# EAGLE board LPC1114 -- Valdez Mutant v.03 (EAGLE 7.0.0)
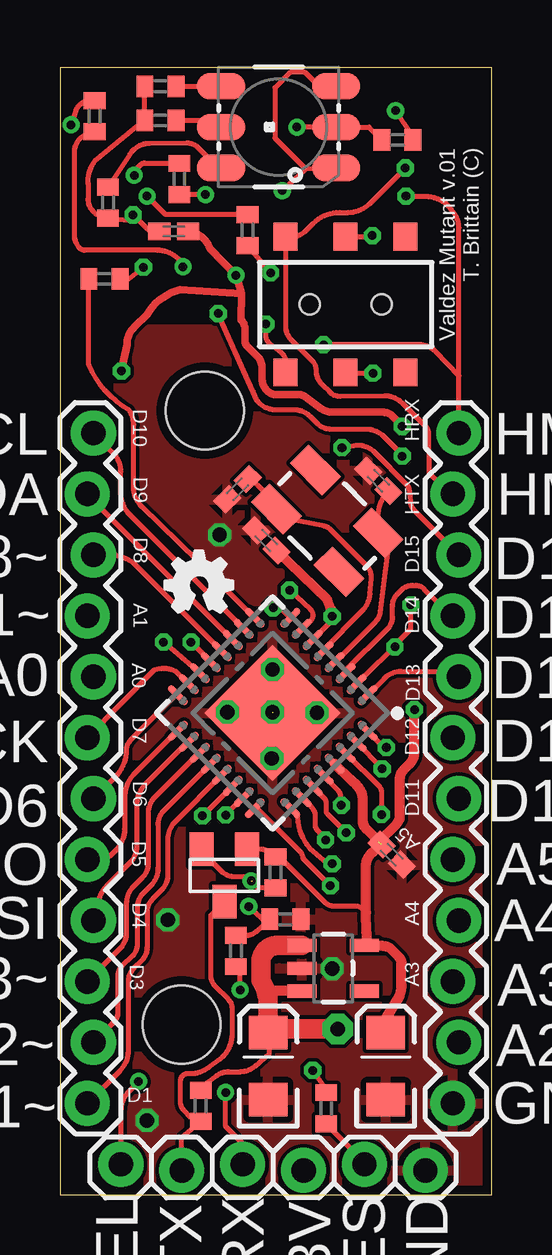
[diagram p0: board, top side]
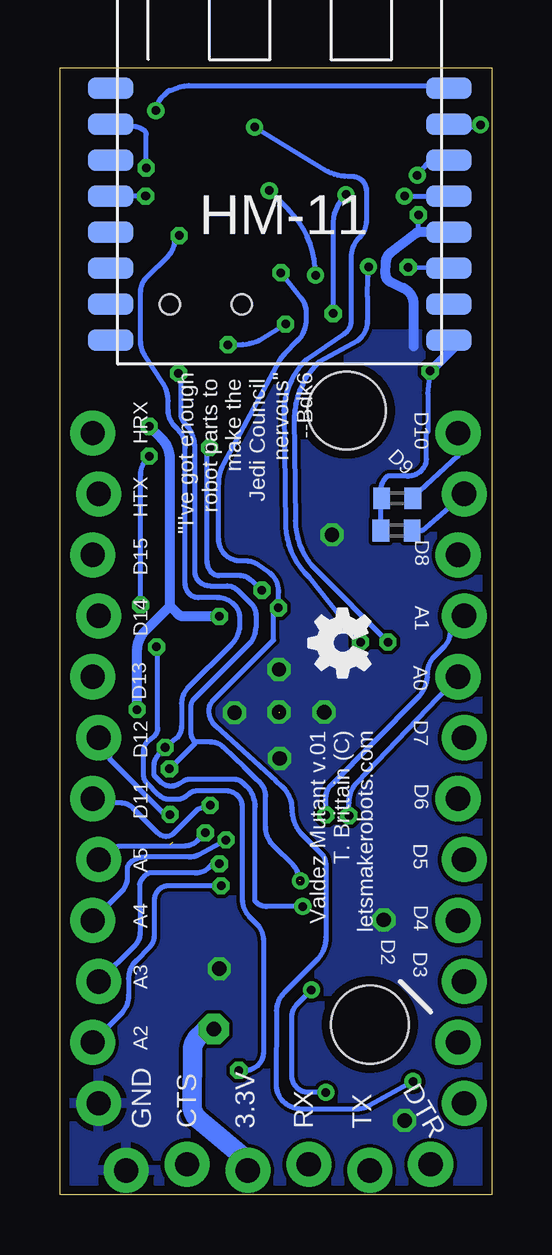
[diagram p1: board, bottom side, seen from below]

Size 18 x 46.97 mm. Coordinates in mm from the lower left corner, seen from the top.
Outline: 0,0 18,0 18,46.97 0,46.97 0,0
Copper layers (1*16): Top 0.0356mm / dielectric 1.5011mm / Bottom 0.0356mm
Design rules "LaenPCBOrder *": minimum track width 6mil, minimum drill 13mil, track to track 6mil, track to pad 6mil, pad to pad 6mil, via to via 6mil, smd to smd 6mil, copper to edge 15mil, drill to drill 6mil, minimum pad ring 7mil, minimum via ring 7mil, stop-mask expansion 3mil, vias tented up to drill 14mil, thermal gap 10mil
Holes 3.25 mm at 5.07,7.1 6.04,32.68

## Footprints (pad centres in the part's own frame; a part is rotated, then mirrored left to right if it is on the bottom)
CRYSTAL-SMD-5X3 = smd 1.9 x 1.1: 1 -1.85,-1.15; 2 1.85,-1.15; 3 1.85,1.15; 4 -1.85,1.15
SOT23-5 = smd 0.55 x 1.2: 1 -0.95,-1.3; 2 0,-1.3; 3 0.95,-1.3; 4 0.95,1.3; 5 -0.95,1.3
EIA3216 = smd 1.4 x 1.6: A 1.4,0; C -1.4,0
C0402K = smd 0.925 x 0.74: 1 -0.6,0; 2 0.6,0
1X12_LOCK = drill 1.016 pad 1.88: 1 0,0.127; 2 2.54,-0.127; 3 5.08,0.127; 4 7.62,-0.127; 5 10.16,0.127; 6 12.7,-0.127; 7 15.24,0.127; 8 17.78,-0.127; 9 20.32,0.127; 10 22.86,-0.127; 11 25.4,0.127; 12 27.94,-0.127
1X06_LOCK = drill 1.016 pad 1.88: 1 0,0; 2 2.54,-0.254; 3 5.08,0; 4 7.62,-0.254; 5 10.16,0; 6 12.7,-0.254
AYZ0202 = smd 1 x 1.15: 1 -2.5,2.825; 2 0,2.825; 3 2.5,2.825; 4 -2.5,-2.825; 5 0,-2.825; 6 2.5,-2.825 | hole 0.85: 1.5,0; -1.5,0
LED-TRICOLOR-5050 = smd 2 x 1.1: 1 -2.4,1.7; 2 -2.4,0; 3 -2.4,-1.7; 4 2.4,-1.7; 5 2.4,0; 6 2.4,1.7
SOT23 = smd 1 x 1.4: 1 -0.95,-1.1; 2 0.95,-1.1; 3 0,1.1
R0402 = smd 0.7 x 0.9: 1 -0.65,0; 2 0.65,0
HVQFN33-7X7 = smd 1.067 x 0.3: P$1 -3.327,2.275; P$2 -3.327,1.625; P$3 -3.327,0.975; P$4 -3.327,0.325; P$5 -3.327,-0.325; P$6 -3.327,-0.975; P$7 -3.327,-1.625; P$8 -3.327,-2.275; P$17 3.327,-2.275; P$18 3.327,-1.625; P$19 3.327,-0.975; P$20 3.327,-0.325; P$21 3.327,0.325; P$22 3.327,0.975; P$23 3.327,1.625; P$24 3.327,2.275 | smd 0.3 x 1.067: P$9 -2.275,-3.327; P$10 -1.625,-3.327; P$11 -0.975,-3.327; P$12 -0.325,-3.327; P$13 0.325,-3.327; P$14 0.975,-3.327; P$15 1.625,-3.327; P$16 2.275,-3.327; P$25 2.275,3.327; P$26 1.625,3.327; P$27 0.975,3.327; P$28 0.325,3.327; P$29 -0.325,3.327; P$30 -0.975,3.327; P$31 -1.625,3.327; P$32 -2.275,3.327 | smd 4 x 4: P$33 0,0
HM-11 = smd 1.9 x 0.9: 1 -0.3,11.5; 2 -0.3,10; 3 -0.3,8.5; 4 -0.3,7; 5 -0.3,5.5; 6 -0.3,4; 7 -0.3,2.5; 8 -0.3,1; 9 13.8,1; 10 13.8,2.5; 11 13.8,4; 12 13.8,5.5; 13 13.8,7; 14 13.8,8.5; 15 13.8,10; 16 13.8,11.5

## Placement (x,y rotation side)
7V-12.500MAAV-T  12.5mhz  [CRYSTAL-SMD-5X3]  11.15,28.09 315 top
AP2112K-3.3TRG1  V_REG_LDOSMD  [SOT23-5]  11.4,9.44 270 top
C1  10uF  [EIA3216]  8.69,5.36 90 top
C2  22pF  [C0402K]  7.4,29.41 45 top
C3  22pF  [C0402K]  13.28,29.75 315 top
C4  10uF  [EIA3216]  13.59,5.36 90 top
C5  1uF  [C0402K]  13.84,14.18 315 top
C6  1uF  [C0402K]  8.61,27.27 135 top
C7  1uF  [C0402K]  4.75,40.16 180 top
JP1  M12LOCK  [1X12_LOCK]  1.27,3.81 90 top
JP2  M12LOCK  [1X12_LOCK]  16.51,3.81 90 top
JP3  [1X06_LOCK]  2.54,1.27 0 top
JS202011SCQN  DPDT  [AYZ0202]  11.91,37.11 0 top
LED1  LED-TRICOLOR-5050NO_IC  [LED-TRICOLOR-5050]  9.12,44.5 180 top
Q2  BSS138  [SOT23]  6.86,13.31 180 top
R1  330  [R0402]  11.1,3.61 90 top
R2  1k  [R0402]  1.85,38.18 180 top
R3  10k  [R0402]  5.87,3.71 90 top
R4  10k  [R0402]  8.99,13.44 90 top
R5  20k  [R0402]  9.4,11.48 0 top
R6  10k  [R0402]  7.34,10.16 90 top
R7  470  [R0402]  4.19,44.78 0 top
R8  470  [R0402]  2.01,41.35 90 top
R9  470  [R0402]  4.19,46.2 0 top
R10  4.7K  [R0402]  3.94,29.03 0 bottom
R11  4.7K  [R0402]  3.96,27.69 0 bottom
R12  330  [R0402]  4.98,42.34 90 top
R13  330  [R0402]  7.82,40.21 90 top
R14  330  [R0402]  1.45,44.96 90 top
R15  330  [R0402]  14.07,43.97 0 top
U1  [HVQFN33-7X7]  8.87,20.08 225 top
U$1  HM-11  [HM-11]  15.59,34.62 0 bottom
U$2  [OSHW_FILLX100_NOTEXT]  4.38,24.28 0 top
U$3  [OSHW_FILLX100_NOTEXT]  5.08,21.59 90 bottom

## Library data of the parts
7V-12.500MAAV-T = SparkFun-FreqCtrl
AP2112K-3.3TRG1 = SparkFun-PowerIC
C1 C4 = SparkFun-Capacitors
C2 C3 C5-C7 R1-R15 = resistor
JP1-JP3 = SparkFun-Connectors
JS202011SCQN = SparkFun-Electromechanical; PROD_ID: SWCH-08179
LED1 = SparkFun-LED
Q2 = SparkFun-DiscreteSemi; PROD_ID: TRANS-00830
U1 = microbuilder; DIGIKEY#: 568-4948-ND; MANF: NXP; MANF#: LPC1114FHN33/301,5
U$1 = HM-11
U$2 U$3 = ohw-logo

## Nets
3.3V: AP2112K-3.3TRG1.5 C4.A C5.1 C6.1 C7.1 LED1.1 LED1.3 Q2.1 R4.2 R10.1 R11.1 U1.P$6 U1.P$29 U$1.9
5V: AP2112K-3.3TRG1.1 AP2112K-3.3TRG1.3 C1.A JP3.4 R3.2
CONN: R15.2 U$1.16
GND: AP2112K-3.3TRG1.2 C1.C C2.1 C3.1 C4.C C5.2 C6.2 C7.2 JP2.1 JP3.6 R5.2 R7.1 R8.1 R9.1 U1.P$33 U$1.12
HM-RX: JP2.12 JS202011SCQN.4 U$1.4
HM-TX: JP2.11 JS202011SCQN.1 U$1.2
HM_CONN: LED1.2 R15.1 U1.P$13
HM_KEY: R14.1 U1.P$14
IO20: JP2.8 U1.P$1
IO_00_RES: R1.2 R12.1 U1.P$2
IO_01: JP2.9 U1.P$3
IO_02_SEL: JP3.1 R13.1 U1.P$8
IO_03: R2.2 U1.P$9
IO_05-SDA: JP1.11 R11.2 U1.P$11
IO_06: JP1.7 U1.P$15
IO_07: JP1.6 U1.P$16
IO_08: JP1.5 U1.P$17
IO_08-SCL: JP1.12 R10.2 U1.P$10
IO_09: JP1.4 U1.P$18
IO_10: JP1.8 U1.P$22
IO_010: JP1.3 U1.P$19
IO_11: JP1.9 U1.P$23
IO_011: JP1.1 U1.P$21
IO_12: JP2.2 U1.P$24
IO_13: JP2.3 U1.P$25
IO_14: JP2.4 U1.P$26
IO_15: JP2.7 U1.P$30
IO_18: JP2.10 U1.P$7
IO_19: JP1.10 U1.P$12
IO_32: JP2.6 U1.P$28
IO_110: JP1.2 U1.P$20
IO_111: JP2.5 U1.P$27
KEY: R14.2 U$1.15
LPC_RES: R12.2 U$1.14
LPC_SEL_BOOT: R13.2 U$1.13
N$2: LED1.4 R9.2
N$3: LED1.6 R8.2
N$4: LED1.5 R7.2
N$9: R2.1 U$1.11
N$31: 7V-12.500MAAV-T.3 C3.2 U1.P$4
N$32: 7V-12.500MAAV-T.1 C2.2 U1.P$5
RESET: JP3.5 R1.1
RX: JS202011SCQN.2 R5.1 R6.2 U1.P$32
RX-5V: JP3.3 R6.1
TX: JS202011SCQN.5 Q2.2 R4.1 U1.P$31
TX-5V: JP3.2 Q2.3 R3.1

## Tracks (layer width: path | path; a pad name or v marks a point on that pad's centre or on a via)
3.3V  (via drill 0.36, 0.36 pad 0.25)  (1 unrouted)
  Top 0.203: AP2112K-3.3TRG1.5 | 11.35,23.94 U1.P$6 | Q2.1 8.33,14.41 arc-45 8.91,14.17 R4.2 9.15,14.09 11.08,12.16 arc45 11.37,12.04 12.3,12.04 arc-45 12.62,11.9 12.77,11.76 | 12.21,42.72 12.08,42.7 LED1.1 10.26,42.75 | 10.26,42.75 v9.27,41.86 | v7.34,38.33 7.34,38.32 7.36,38.3 | LED1.3 10.8,46.2 10.21,46.79 9.6,46.79 8.97,46.15 8.97,44.05 10.26,42.75
  Top 0.305: v14.28,32.03 13.86,32.46 arc46 13.5,32.61 11.37,32.61 arc-37 10.88,32.78 10.21,33.27 arc37 9.98,33.35 9,33.35 arc-45 8.68,33.48 8.64,33.52 arc-45 8.43,34.02 8.43,34.44 arc45 8.22,34.96 7.81,35.37 arc-45 7.72,35.58 7.72,36.06 arc45 7.55,36.46 7.57,37.57 | v2.56,34.34 2.79,35.42 arc-45 3.1,36.18 3.62,36.7 arc-45 5.02,37.72 7.57,37.57 | 7.57,37.57 7.36,38.3 6.27,39.43 arc64 C7.1
  Top 0.406: U1.P$29 12.14,17.3 12.38,17.05 arc-45 12.62,16.48 12.62,15.6 arc45 12.77,15.24 C5.1 13.01,14.25 12.98,14.22 arc45 12.75,13.68 12.77,11.76 12.78,10.95 12.78,10.47 AP2112K-3.3TRG1.5 12.73,10.36 13.48,10.36 arc-45 13.84,10.22 14.11,9.95 arc-45 14.25,9.61 14.25,8.75 arc-31 14.07,8.12 13.61,7.37 C4.A | v14.78,20.22 14.78,18.45 arc-45 14.58,17.95 14.34,17.72 arc45 14.17,17.31 14.17,15.78 arc-45 14.04,15.47 13.28,14.71 | 11.35,23.94 v11.35,24.11 11.3,24.4 11.15,24.81 C6.1
  Bottom 0.203: R10.1 4.61,29.01 R11.1 4.61,29.4 arc45 4.42,29.87 4.32,29.97 3.59,29.97 arc-45 3,30.12 2.89,30.23 arc-45 2.72,30.65 2.72,31.75 2.66,31.81 2.66,33.38 v2.56,34.34 | v7.34,38.33 7.34,38.36 arc-45 8.45,41.04 v9.27,41.86
  Bottom 0.406: v14.78,20.22 14.78,22.67 arc45 14.43,23.52 13.41,24.54 | 13.41,24.54 13.41,30.67 arc-45 13.76,31.52 v14.28,32.03 | v2.56,34.34 1.52,35.36 U$1.9 | 11.23,23.98 v11.35,24.11 12.81,24.11 arc45 13.1,24.23 13.41,24.54
5V  (via drill 0.6 pad 1.27)
  Top 0.203: AP2112K-3.3TRG1.3 | 8.84,6.91 C1.A 8.74,6.71 8.74,5.89 8.13,5.36 arc-41 7.53,5.13 7.05,5.13 arc37 6.53,4.96 5.93,4.51 R3.2
  Top 0.406: 8.59,8.51 9.68,8.51 AP2112K-3.3TRG1.3
  Top 0.813: 8.77,6.68 C1.A 8.69,8.1 arc17 8.66,8.25 8.59,8.51 8.38,8.94 8.38,9.68 arc-45 8.6,10.2 arc-45 9.06,10.39 AP2112K-3.3TRG1.1 | v11.58,6.91 8.84,6.91
  Bottom 0.813: JP3.4 10.16,1.42 12.18,3.09 arc51 12.49,3.76 12.47,5.97 arc45 12.2,6.62 11.91,6.91 v11.58,6.91
CONN  (via drill 0.36)
  Top 0.203: R15.2 14.72,44.13 v14,45.19
  Bottom 0.203: v14,45.19 13.98,45.22 arc45 13.65,45.84 13.46,46.02 13.44,46.02 13.07,46.15 arc19 12.62,46.23 2.23,46.23 U$1.16
GND  (via drill 0.36, 0.6 pad 0.81)  (1 unrouted)
  Top 0.203: 4.15,40.11 C7.2 3.94,40.16 arc-45 3.58,40.31 v3.05,40.84 2.83,40.63 R8.1 1.94,40.77 1.91,40.77 arc-90 1.17,41.51 1.17,42.13 arc-45 1.45,43.09 3.2,44.53 3.54,44.53 R7.1 R9.1
  Bottom 0.203: 3.06,40.12 3.06,40.42 v3.05,40.84
  Bottom 0.406: 3.25,35.36 3.25,37.13 arc-64 3.67,37.79 4.23,38.06 arc64 4.42,38.36 4.41,38.88 arc51 4.21,39.26 3.17,40.07 arc25 3.06,40.12 U$1.12
  other vias: 8.86,20.12 8.86,21.89 10.72,20.09 8.84,18.19 6.99,20.12 3.63,3.1 11.35,9.42 4.5,11.46 6.65,27.51
  pour Bottom: 0,35.86 0,0 17.78,0 17.78,35.86
  pour Top: 0.2,36.07 0,0 17.78,0 17.98,36.07
HM-RX  (via drill 0.36, 0.36 pad 0.25)
  Top 0.203: JS202011SCQN.4 9.41,34.72 arc52 9.22,35.11 8.72,35.51 arc-18 8.66,35.57 8.66,35.57 arc-34 8.59,35.82 v8.59,36.3 | JP2.12 16.64,34.14 | 16.64,34.14 16.64,40.3 arc38 16.41,40.95 16.3,41.09 arc52 15.25,41.6 14.45,41.6 v14.43,41.63 | 16.64,34.14 15.68,35.14 arc46 14.98,35.43 v11,35.43
  Bottom 0.203: v14.43,41.63 15.88,41.63 U$1.4 | v11,35.43 10.5,35.43 arc-25 9.7,35.61 v8.59,36.3
HM-TX  (via drill 0.36 pad 0.25)
  Top 0.203: v14.4,42.8 12.92,41.32 arc-45 12.02,40.95 11.66,40.95 arc45 10.57,40.49 10.27,40.19 arc-45 9.65,39.93 JS202011SCQN.1 9.42,39.92 9.42,36.17 arc45 9.64,35.65 10.52,34.77 arc-45 10.69,34.35 arc45 10.93,33.77 11.25,33.45 arc46 11.68,33.28 13.54,33.3 arc-45 14.28,33 15.25,32.05 arc-45 15.37,31.76 15.39,30.07 JP2.11
  Bottom 0.203: v14.4,42.8 14.4,44.2 arc-45 14.45,44.32 arc-45 14.94,44.53 15.79,44.53 U$1.2
HM_CONN  (via drill 0.36, 0.36 pad 0.25)
  Top 0.203: U1.P$13 6.22,22.2 6.22,22.28 v5.46,23.04 | 11.51,44.45 11.47,44.49 | 11.47,44.49 v9.88,44.5 | 11.47,44.49 11.48,44.5 LED1.2 12.89,44.5 R15.1
  Bottom 0.203: v5.46,23.04 7.61,25.75 arc45 8.59,27.85 8.66,32.71 arc45 7.72,34.8 6.13,35.89 arc-56 5.85,36.42 5.85,39.06 arc45 5.5,39.92 arc-45 5.21,40.62 5.21,41.83 arc-90 5.82,42.44 5.98,42.44 arc31 6.95,42.72 v9.88,44.5
HM_KEY  (via drill 0.36, 0.36 pad 0.25)
  Top 0.203: U1.P$14 5.83,21.76 v4.32,23.04 | v5.13,38.68 5.13,38.81 4.93,39.01 arc45 4.06,39.37 1.03,39.37 arc-45 0.83,39.45 arc-45 0.61,39.99 0.61,43.47 arc-90 1.39,44.25 R14.1
  Bottom 0.203: v4.32,23.04 7.33,26.05 arc45 8.18,28.1 8.23,32.42 arc45 7.18,34.73 5.58,35.59 5.49,35.69 arc-45 5.18,36.43 5.18,37.45 5.16,38.28 v5.13,38.68
IO20
  Top 0.203: U1.P$1 13.53,21.53 arc-45 14.23,21.82 16.41,21.82 JP2.8
IO_00_RES  (via drill 0.36, 0.36 pad 0.25)
  Top 0.203: v14.63,24.59 14.63,23.62 arc-45 14.59,23.53 13.97,22.91 v13.97,22.84 13.11,22.02 U1.P$2 | v14.28,30.79 14.22,30.89 13.5,31.61 arc45 12.79,31.9 11.33,31.9 arc-45 10.72,32.16 10.45,32.43 arc45 9.76,32.72 8.95,32.72 arc-48 8.22,33.1 8.05,33.49 7.84,33.94 v6.6,36.73 | v10.54,5.18 11.1,4.42 R1.2 | v6.07,41.69 R12.1
  Bottom 0.203: v13.97,22.84 13.92,22.78 13.92,19.44 arc52 14.09,19.09 14.33,18.91 arc-52 14.5,18.55 14.5,17.43 arc-45 14.41,17.2 13.86,16.65 arc-45 13.46,16.48 13.09,16.48 arc-41 12.72,16.62 12.64,16.69 arc41 12.25,16.84 11.09,16.84 arc49 10.56,16.6 arc41 10.39,16.15 10.39,12.32 arc-45 10.08,11.58 9.8,11.3 arc45 9.5,10.58 9.5,5.94 arc54 9.81,5.34 arc36 10.31,5.18 v10.54,5.18 | v14.63,24.59 14.63,30.01 arc49 v14.28,30.79 | v6.6,36.73 6.6,40.41 arc45 v6.07,41.69
IO_01
  Top 0.203: U1.P$3 11.91,21.84 13.68,23.61 arc45 13.87,24.07 13.87,24.52 arc-45 14.1,25.07 14.23,25.21 arc-45 14.7,25.4 14.83,25.4 arc-45 15.19,25.25 15.65,24.79 16.26,24.21 JP2.9
IO_02_SEL  (via drill 0.36, 0.36 pad 0.25)
  Top 0.203: v8.89,24.46 9.3,24.36 U1.P$8 | v3.28,4.72 3.28,4.7 2.87,4.29 arc45 2.54,3.5 JP3.1 | v8.79,38.43 7.92,39.46 R13.1
  Bottom 0.203: v3.28,4.72 5.08,3.72 arc29 5.62,3.58 7.94,3.58 arc45 8.69,3.89 arc45 8.99,4.61 8.97,7.67 arc45 8.66,8.4 7.32,9.75 arc-45 6.91,10.74 6.91,13.78 arc-45 7.08,14.19 7.87,14.98 arc45 8.33,16.09 arc-49 8.76,17.04 8.99,17.25 11.5,19.52 arc48 11.79,20.18 arc45 11.61,20.59 9.09,23.11 9.09,24.28 v8.89,24.46 8.88,25.12 arc-56 9.31,25.96 9.72,26.25 arc-35 10.24,26.42 10.47,26.42 arc90 11.38,27.33 11.38,29.63 arc28 11.17,30.46 8.81,34.81 arc17 8.62,35.06 8.09,35.6 arc-45 7.72,36.48 7.72,36.79 arc-39 7.92,37.36 v8.79,38.43
IO_03
  Top 0.203: U1.P$9 8.11,24.04 5.71,26.44 3.42,28.67 arc-46 3.07,29.49 3.07,32.1 arc36 2.88,32.71 arc-36 1.2,34.59 R2.2
IO_05-SDA
  Top 0.203: JP1.11 1.14,29.19 U1.P$11
  Bottom 0.203: R11.2 2.9,27.69 JP1.11
IO_06
  Top 0.203: U1.P$15 5.31,21.36 4.83,21.81 arc45 3.94,21.87 JP1.7
IO_07
  Top 0.203: U1.P$16 4.82,20.82 2.94,18.94 arc45 2.77,18.53 arc-45 2.31,17.42 JP1.6
IO_08
  Top 0.203: U1.P$17 4.88,19.34 3.13,17.58 arc45 2.69,16.52 2.69,15.23 arc-45 2.34,14.38 2.13,14.17 arc-45 1.47,13.89 1.22,13.89 JP1.5
IO_08-SCL
  Top 0.203: U1.P$10 7.67,23.6 2.91,28.36 arc-45 2.54,29.25 2.54,30.13 arc45 2.2,30.94 JP1.12
  Bottom 0.203: JP1.12 1.4,30.79 3.25,29.08 arc45 3.24,29.08 R10.2
IO_09
  Top 0.203: U1.P$18 5.31,18.88 3.59,17.15 arc45 3.2,16.22 3.2,14.5 arc-45 2.93,13.85 1.93,12.85 arc45 1.57,12 1.57,11.61 JP1.4
IO_10  (via drill 0.36 pad 0.25)
  Top 0.203: U1.P$22 v5.94,15.8
  Bottom 0.203: v5.94,15.8 5.94,16.35 arc44 5.6,17.2 JP1.8
IO_010
  Top 0.203: U1.P$19 5.79,18.42 3.96,16.59 arc45 3.68,15.91 3.68,13.83 arc-45 3.42,13.2 3.06,12.84 arc45 2.77,12.14 2.77,10.93 arc-45 2.48,10.22 JP1.3
IO_11  (via drill 0.36 pad 0.25)
  Top 0.203: U1.P$23 7.61,16.58 v6.91,15.82
  Bottom 0.203: v6.91,15.82 6.91,16.55 arc45 6.69,17.09 3.06,20.73 arc-45 2.67,21.7 2.67,21.75 arc45 2.39,22.43 2.01,22.81 arc-45 1.7,23.55 1.7,23.57 JP1.9
IO_011
  Top 0.203: U1.P$21 4.8,15.55 arc45 4.5,14.81 4.5,13.34 arc-45 4.22,12.68 3.87,12.32 arc45 3.63,11.76 3.63,10.3 arc-45 3.4,9.76 3.08,9.43 arc45 2.85,8.87 2.85,6.02 arc-45 2.49,5.15 JP1.1
IO_12  (via drill 0.36 pad 0.25)
  Top 0.203: U1.P$24 8.19,16.12 10.03,14.28 arc-45 10.13,14.02 v11.28,12.88
  Bottom 0.203: v11.28,12.88 13.49,12.88 arc-45 13.88,12.72 arc-45 14.07,12.25 14.07,10.78 arc45 14.26,10.33 14.83,9.75 arc-45 15.14,9.02 15.14,8.32 arc45 15.47,7.51 JP2.2
IO_13  (via drill 0.36 pad 0.25)
  Top 0.203: U1.P$25 9.87,15.81 9.91,15.71 arc40 10.4,14.46 11.15,13.82 v11.35,13.79
  Bottom 0.203: v11.35,13.79 11.43,13.99 11.78,13.64 arc45 12.35,13.41 14.3,13.41 arc-45 14.68,12.95 14.66,10.92 arc46 14.87,10.4 JP2.3
IO_14  (via drill 0.36 pad 0.25)
  Top 0.203: U1.P$26 10.12,16.58 10.54,16.09 arc-41 10.64,15.82 10.64,15.43 arc40 10.73,15.18 v11.07,14.78
  Bottom 0.203: v11.07,14.78 12.22,14.17 arc28 12.6,14.07 14.46,14.07 arc-45 15.1,13.8 arc-45 15.19,13.59 15.19,13.24 arc45 15.45,12.62 JP2.4
IO_15  (via drill 0.36 pad 0.25)
  Top 0.203: U1.P$30 13.31,17.01 arc-45 13.41,16.78 v13.41,15.85
  Bottom 0.203: v13.41,15.85 13.56,15.8 15.92,18.16 arc57 15.93,18.16 arc-57 16.1,18.77 JP2.7
IO_18  (via drill 0.36 pad 0.25)
  Top 0.203: U1.P$7 10.05,23.54 10.45,23.92 arc94 10.45,24.4 v9.58,25.2 | v11.76,31.14 12.24,31.23 arc-55 13.12,30.95 14.46,29.61 arc-40 14.57,29.38 14.61,28.87 arc40 14.77,28.54 JP2.10
  Bottom 0.203: v9.58,25.2 10.1,25.66 arc-42 10.48,25.81 11.38,25.81 arc47 11.68,25.94 arc43 11.86,26.41 11.86,31.04 v11.76,31.14
IO_19
  Top 0.203: JP1.10 2.07,26.67 arc-45 3.22,26.19 U1.P$12
IO_32  (via drill 0.36 pad 0.25)
  Top 0.203: U1.P$28 10.99,17.48 11.6,16.85 arc-44 11.71,16.58 11.71,16.36 v11.73,16.23
  Bottom 0.203: v11.73,16.23 12.27,16.05 13.25,15.07 arc45 13.58,14.94 arc45 13.9,15.07 14.94,16.11 arc-45 15.48,16.33 16.46,16.33 JP2.6
IO_110
  Top 0.203: U1.P$20 6.28,17.96 4.34,16.03 arc45 4.09,15.41 4.09,13.62 arc-45 3.78,12.88 3.46,12.56 arc45 3.23,11.98 3.23,10.44 arc-45 3.03,9.96 2.58,9.51 arc45 2.41,9.12 2.41,7.56 arc-45 2.27,7.23 JP1.2
IO_111  (via drill 0.36 pad 0.25)
  Top 0.203: U1.P$27 10.53,17.03 11.02,16.54 arc-45 11.1,16.34 11.1,16.01 arc45 11.16,15.87 v11.94,15.09
  Bottom 0.203: v11.94,15.09 12.25,14.78 arc45 12.85,14.53 15.39,14.53 arc-45 16.13,14.22 JP2.5
KEY  (via drill 0.36)
  Top 0.203: R14.2 1.13,45.61 arc45 0.67,45.22 v0.46,44.6
  Bottom 0.203: v0.46,44.6 0.66,44.5 0.89,44.48 1.64,44.48 U$1.15
LPC_RES  (via drill 0.36)
  Top 0.203: v3.1,42.49 3.1,42.62 3.15,42.72 3.35,42.92 arc-45 3.54,43 4.97,43 R12.2
  Bottom 0.203: v3.1,42.49 2.55,43.12 U$1.14
LPC_SEL_BOOT  (via drill 0.36)
  Top 0.203: R13.2 4.41,40.86 v3.63,41.63
  Bottom 0.203: v3.63,41.63 U$1.13
N$2
  Top 0.203: R9.2 6.49,46.2 LED1.4
N$3
  Top 0.203: LED1.6 6.68,42.7 6.68,42.72 5.76,43.64 arc46 5.29,43.84 3.73,43.82 arc56 2.92,43.38 R8.2
N$4
  Top 0.203: R7.2 7.07,44.79 arc-165 LED1.5
N$9  (via drill 0.36 pad 0.25)
  Top 0.203: R2.1 2.85,38.17 v3.48,38.66
  Bottom 0.203: v3.48,38.66 1.8,38.63 U$1.11
N$31
  Top 0.203: U1.P$4 11.48,22.2 13.17,23.89 arc38 13.36,24.29 13.59,26.11 13.69,26.92 7V-12.500MAAV-T.3 13.27,28.29 arc-45 C3.2
N$32
  Top 0.203: U1.P$5 10.99,22.7 12.61,24.34 arc40 12.93,25.05 12.98,25.7 arc49 12.78,26.23 11.29,27.73 arc34 11.03,27.87 9.41,28.19 7V-12.500MAAV-T.1 9.03,28.79 8.26,29.57 7.85,29.88 C2.2
RESET
  Top 0.203: JP3.5 12.7,1.36 R1.1
RX  (via drill 0.36, 0.36 pad 0.25)
  Top 0.203: U1.P$32 12.87,19.34 13.18,18.97 13.51,18.64 v13.61,18.64 | JS202011SCQN.2 12.98,39.93 v13.03,39.98 | R6.2 7.78,10.81 arc42 8.17,10.96 R5.1 8.46,11.48 v7.87,12.01
  Bottom 0.203: v13.03,39.98 13.21,39.8 arc45 13.48,39.15 14.39,38.24 arc-45 14.63,37.66 14.63,35.53 arc-33 14.48,35.03 13.7,33.8 arc33 13.49,33.09 13.49,32.69 arc-45 13.22,32.04 13.08,31.91 arc45 12.78,31.16 12.78,25.45 arc-90 12.22,24.89 11.43,24.89 arc45 10.73,24.6 arc45 10.49,24.02 10.49,23.79 arc45 10.85,22.94 12.67,21.11 arc-45 12.93,20.48 12.93,19.5 arc51 13.16,19.01 v13.61,18.64 13.96,18.24 arc-41 14.07,17.94 14.07,17.48 13.81,17.21 arc-77 13.03,17.13 12.86,17.23 arc32 12.56,17.32 10.74,17.32 arc43 10.39,17.19 10.24,17.04 10.21,17.01 arc45 9.86,16.17 9.86,12.22 arc-45 9.37,12.01 v7.87,12.01
RX-5V  (via drill 0.36)
  Top 0.203: JP3.3 7.62,2.13 6.91,2.85 v6.91,4.27 | v7.52,8.53 7.52,9.33 R6.1
  Bottom 0.203: v6.91,4.27 7.65,4.27 arc45 8.12,4.46 arc45 8.33,4.97 8.33,7.39 arc45 8.1,7.96 v7.52,8.53
TX  (via drill 0.36, 0.36 pad 0.25)  (1 unrouted)
  Top 0.203: U1.P$31 v13.44,17.75 | v13.06,34.24 11.96,34.24 JS202011SCQN.5 | Q2.2 5.91,14.31 6.73,13.49 arc45 7.29,13.26 7.8,13.26 v7.98,13.08 8.27,12.79 R4.1
  Bottom 0.203: v13.06,34.24 12.95,33.93 12.95,32.56 arc-45 12.78,32.13 arc45 12.37,31.15 12.37,25.96 arc-45 12.21,25.57 arc-45 11.74,25.38 11.02,25.38 arc45 10.59,25.2 10.02,24.62 arc45 9.83,24.17 9.83,23.63 arc45 10.11,22.97 12.4,20.66 arc-45 12.55,20.32 12.55,19.3 arc-45 U1.P$31 | U1.P$31 11.73,18.87 arc44 11.18,18.65 10.31,17.8 9.78,17.3 9.66,17.18 arc45 9.42,16.61 9.42,15.33 arc-45 9.11,14.57 8.26,13.72 arc45 8.04,13.18 8.04,13.08 | U1.P$31 12.37,18.82 v13.44,17.75
TX-5V
  Top 0.203: JP3.2 5.08,2.4 R3.1 5.48,3.21 5.16,3.53 arc-45 5.03,3.84 5.03,4.75 arc-90 5.33,5.05 5.44,5.05 arc37 6.21,5.31 6.68,5.67 arc53 7.19,6.68 7.19,7.75 arc45 7.03,8.13 6.48,8.69 arc-45 6.3,9.12 6.3,11.65 Q2.3

## Text on the board
tNames: Valdez Mutant v.01 / T. Brittain (C) | D10 SCL | D10 | HRX | HM-RX | D9 SDA | D9 | HTX | HM-TX | D8~ | D8 | D15 | D15 | A1~ | A1 | D14 | D14~ | A0 | A0 | D13 | D13 | D7 SCK | D7 | D12 | D12~ | D6 | D6 | D11 | D11 | D5~MISO | D5 | A5 | A5 | D4~MOSI | D4 | A4 | A4~WAKE | D3~ | D3 | A3 | A3~ | D2~ | A2~ | D1~ | D1 | GND | TX | RX | 3.3V | GND | DTR/SEL | CTS/RES
bNames: "I've got enough / robot parts to / make the / Jedi Council / nervous" / --Bdk6 | D10 | HRX | D9 | HTX | D8 | D15 | A1 | D14 | A0 | D13 | D7 | D12 | Valdez Mutant v.01 / T. Brittain (C) / letsmakerobots.com | D6 | D11 | D5 | A5 | D4 | A4 | D2 | D3 | A3 | A2 | DTR | TX | RX | 3.3V | CTS | GND